# Altium PCB layout.PcbDoc (part 8 of 11)
Units mil, origin at the board's own origin, x right, y up, seen from the top; angles counter-clockwise.
Board outline 3543.31 x 3149.61 mil, 2 copper layers (Top Layer, Bottom Layer); 78 components, 73 nets, 327 pads, 143 vias.
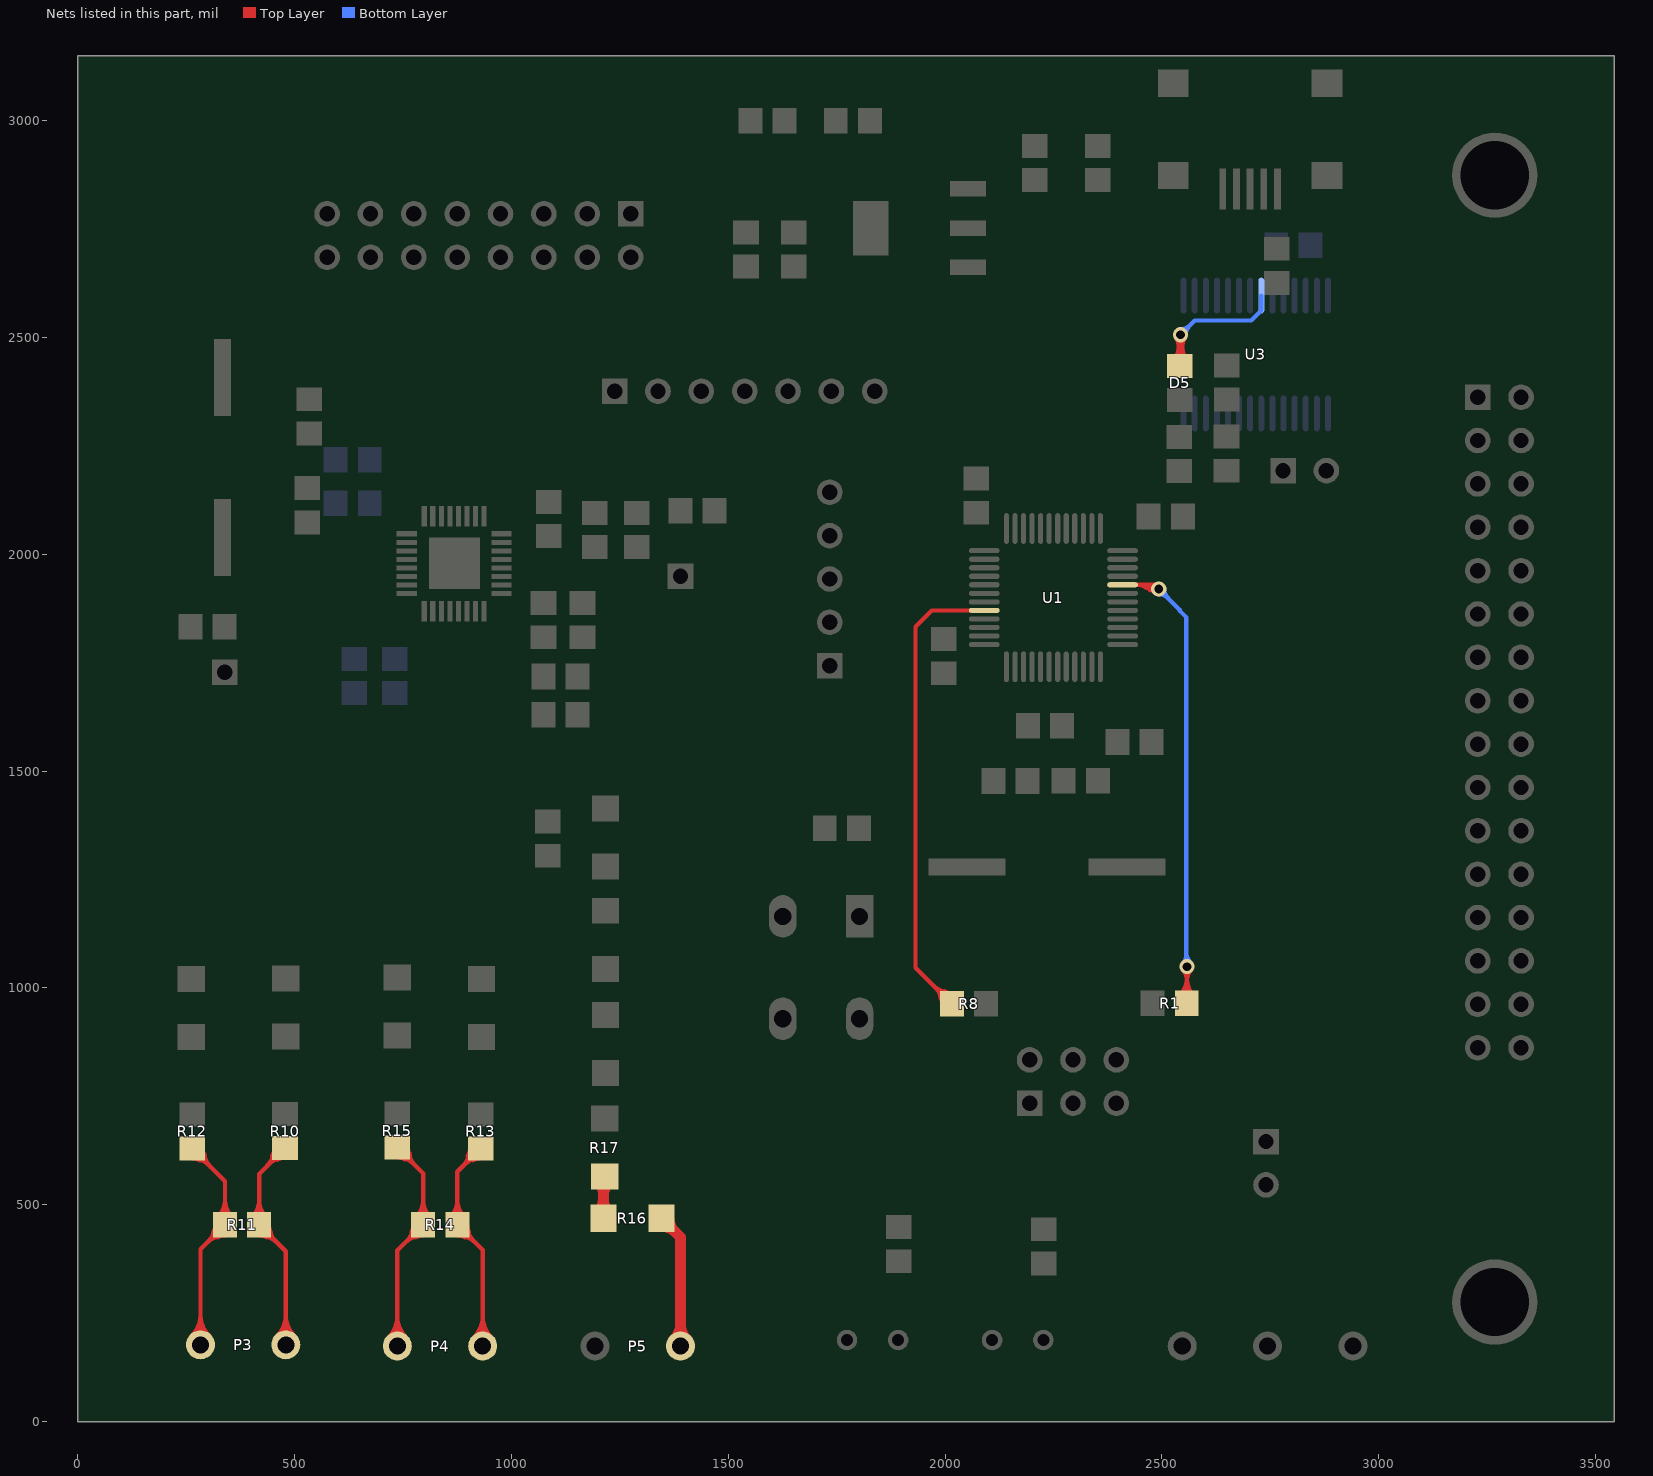
[diagram p8: the nets of this part, all layers, seen from the top]

## Via types
v1: diameter 35, hole 20, Top Layer to Bottom Layer, tented both sides, 113 vias
v2: diameter 35, hole 20, Top Layer to Bottom Layer, 28 vias
v3: diameter 35.43, hole 35.43, Top Layer to Bottom Layer, 2 vias

## Nets (pads, with @x,y where several pads share a name; then routed paths per layer and width w, separated by ;. In a path a pad name is that pad's centre, name@x,y a point inside that pad or via, vN(x,y) a via of type N, cw(c..) or ccw(c..) an arc to the next point about the centre after c; other vN are vias at no path point) (continued)
NetD5_2: D5.2 U3.22 | length 2738.7
  Top Layer w10: D5.2@2543,2444.37 v2(2543,2506) ; D5.2@2527.02,2450.32 ccw(c2488.43,2488.91) v2@2543,2488.91 ; D5.2@2527.02,2450.32 ccw(c2488.43,2488.91) v2@2543,2488.91 ; D5.2@2527.02,2450.32 ccw(c2488.43,2488.91) v2@2543,2488.91 ; D5.2@2527.02,2450.32 ccw(c2488.43,2488.91) v2@2543,2488.91 ; D5.2@2527.02,2450.32 ccw(c2488.43,2488.91) v2@2543,2488.91 ; v2@2532.64,2499 cw(c2502.31,2478.5) 2537.67,2469.03 ; v2@2532.64,2499 cw(c2502.31,2478.5) 2537.67,2469.03 ; v2@2532.64,2499 cw(c2502.31,2478.5) 2537.67,2469.03 ; v2@2532.64,2499 cw(c2502.31,2478.5) 2537.67,2469.03 ; v2@2532.64,2499 cw(c2502.31,2478.5) 2537.67,2469.03 ; v2@2532.64,2499 cw(c2502.31,2478.5) 2537.67,2469.03 ; v2@2532.64,2499 cw(c2502.31,2478.5) 2537.67,2469.03 ; v2@2532.64,2499 cw(c2502.31,2478.5) 2537.67,2469.03 ; v2@2532.64,2499 cw(c2502.31,2478.5) 2537.67,2469.03 ; v2@2532.64,2499 cw(c2502.31,2478.5) 2537.67,2469.03 ; v2@2532.64,2499 cw(c2502.31,2478.5) 2537.67,2469.03 ; v2@2532.64,2499 cw(c2502.31,2478.5) 2537.67,2469.03 ; v2@2532.64,2499 cw(c2502.31,2478.5) 2537.67,2469.03 ; v2@2532.64,2499 cw(c2502.31,2478.5) 2537.67,2469.03 ; v2@2532.64,2499 cw(c2502.31,2478.5) 2537.67,2469.03 ; D5.2@2534.09,2443.25 ccw(c2512.57,2464.77) 2543,2464.77 ; D5.2@2534.09,2443.25 ccw(c2512.57,2464.77) 2543,2464.77 ; D5.2@2534.09,2443.25 ccw(c2512.57,2464.77) 2543,2464.77 ; D5.2@2534.09,2443.25 ccw(c2512.57,2464.77) 2543,2464.77 ; D5.2@2534.09,2443.25 ccw(c2512.57,2464.77) 2543,2464.77 ; v2@2534.16,2497.16 cw(c2512.82,2475.82) 2543,2475.82 ; v2@2534.16,2497.16 cw(c2512.82,2475.82) 2543,2475.82 ; v2@2534.16,2497.16 cw(c2512.82,2475.82) 2543,2475.82 ; v2@2534.16,2497.16 cw(c2512.82,2475.82) 2543,2475.82 ; v2@2534.16,2497.16 cw(c2512.82,2475.82) 2543,2475.82 ; v2@2536.75,2495.17 cw(c2529.28,2482.24) 2543.71,2486.1 ; v2@2536.75,2495.17 cw(c2529.28,2482.24) 2543.71,2486.1 ; v2@2536.75,2495.17 cw(c2529.28,2482.24) 2543.71,2486.1 ; v2@2536.75,2495.17 cw(c2529.28,2482.24) 2543.71,2486.1 ; v2@2536.75,2495.17 cw(c2529.28,2482.24) 2543.71,2486.1 ; v2@2536.75,2495.17 cw(c2529.28,2482.24) 2543.71,2486.1 ; v2@2536.75,2495.17 cw(c2529.28,2482.24) 2543.71,2486.1 ; v2@2536.75,2495.17 cw(c2529.28,2482.24) 2543.71,2486.1 ; v2@2536.75,2495.17 cw(c2529.28,2482.24) 2543.71,2486.1 ; v2@2536.75,2495.17 cw(c2529.28,2482.24) 2543.71,2486.1 ; v2@2536.75,2495.17 cw(c2529.28,2482.24) 2543.71,2486.1 ; v2@2536.75,2495.17 cw(c2529.28,2482.24) 2543.71,2486.1 ; v2@2536.75,2495.17 cw(c2529.28,2482.24) 2543.71,2486.1 ; v2@2536.75,2495.17 cw(c2529.28,2482.24) 2543.71,2486.1 ; v2@2536.75,2495.17 cw(c2529.28,2482.24) 2543.71,2486.1 ; 2542.23,2486.02 cw(c2556.79,2482.12) v2@2549.25,2495.17 ; 2542.23,2486.02 cw(c2556.79,2482.12) v2@2549.25,2495.17 ; 2542.23,2486.02 cw(c2556.79,2482.12) v2@2549.25,2495.17 ; 2542.23,2486.02 cw(c2556.79,2482.12) v2@2549.25,2495.17 ; 2542.23,2486.02 cw(c2556.79,2482.12) v2@2549.25,2495.17 ; 2542.23,2486.02 cw(c2556.79,2482.12) v2@2549.25,2495.17 ; 2542.23,2486.02 cw(c2556.79,2482.12) v2@2549.25,2495.17 ; 2542.23,2486.02 cw(c2556.79,2482.12) v2@2549.25,2495.17 ; 2542.23,2486.02 cw(c2556.79,2482.12) v2@2549.25,2495.17 ; 2542.23,2486.02 cw(c2556.79,2482.12) v2@2549.25,2495.17 ; 2542.23,2486.02 cw(c2556.79,2482.12) v2@2549.25,2495.17 ; 2542.23,2486.02 cw(c2556.79,2482.12) v2@2549.25,2495.17 ; 2542.23,2486.02 cw(c2556.79,2482.12) v2@2549.25,2495.17 ; 2542.23,2486.02 cw(c2556.79,2482.12) v2@2549.25,2495.17 ; 2542.23,2486.02 cw(c2556.79,2482.12) v2@2549.25,2495.17 ; 2543,2464.61 ccw(c2573.21,2464.61) D5.2@2551.85,2443.25 ; 2543,2464.61 ccw(c2573.21,2464.61) D5.2@2551.85,2443.25 ; 2543,2464.61 ccw(c2573.21,2464.61) D5.2@2551.85,2443.25 ; 2543,2464.61 ccw(c2573.21,2464.61) D5.2@2551.85,2443.25 ; 2543,2464.61 ccw(c2573.21,2464.61) D5.2@2551.85,2443.25 ; 2543,2475.82 cw(c2573.18,2475.82) v2@2551.84,2497.16 ; 2543,2475.82 cw(c2573.18,2475.82) v2@2551.84,2497.16 ; 2543,2475.82 cw(c2573.18,2475.82) v2@2551.84,2497.16 ; 2543,2475.82 cw(c2573.18,2475.82) v2@2551.84,2497.16 ; 2543,2475.82 cw(c2573.18,2475.82) v2@2551.84,2497.16 ; v2@2543,2488.76 ccw(c2597.35,2488.76) D5.2@2558.92,2450.32 ; v2@2543,2488.76 ccw(c2597.35,2488.76) D5.2@2558.92,2450.32 ; v2@2543,2488.76 ccw(c2597.35,2488.76) D5.2@2558.92,2450.32 ; v2@2543,2488.76 ccw(c2597.35,2488.76) D5.2@2558.92,2450.32 ; v2@2543,2488.76 ccw(c2597.35,2488.76) D5.2@2558.92,2450.32 ; 2548.28,2469.05 cw(c2583.5,2478.49) v2@2553.34,2498.98 ; 2548.28,2469.05 cw(c2583.5,2478.49) v2@2553.34,2498.98 ; 2548.28,2469.05 cw(c2583.5,2478.49) v2@2553.34,2498.98 ; 2548.28,2469.05 cw(c2583.5,2478.49) v2@2553.34,2498.98 ; 2548.28,2469.05 cw(c2583.5,2478.49) v2@2553.34,2498.98 ; 2548.28,2469.05 cw(c2583.5,2478.49) v2@2553.34,2498.98 ; 2548.28,2469.05 cw(c2583.5,2478.49) v2@2553.34,2498.98 ; 2548.28,2469.05 cw(c2583.5,2478.49) v2@2553.34,2498.98 ; 2548.28,2469.05 cw(c2583.5,2478.49) v2@2553.34,2498.98 ; 2548.28,2469.05 cw(c2583.5,2478.49) v2@2553.34,2498.98 ; 2548.28,2469.05 cw(c2583.5,2478.49) v2@2553.34,2498.98 ; 2548.28,2469.05 cw(c2583.5,2478.49) v2@2553.34,2498.98 ; 2548.28,2469.05 cw(c2583.5,2478.49) v2@2553.34,2498.98 ; 2548.28,2469.05 cw(c2583.5,2478.49) v2@2553.34,2498.98 ; 2548.28,2469.05 cw(c2583.5,2478.49) v2@2553.34,2498.98
  Bottom Layer w10: v2(2543,2506) 2576,2539 2706.03,2539 2729.33,2562.3 U3.22@2729.33,2596.46 ; v2@2543,2518.5 ccw(c2543,2548.68) 2564.34,2527.34 ; v2@2543,2518.5 ccw(c2543,2548.68) 2564.34,2527.34 ; v2@2543,2518.5 ccw(c2543,2548.68) 2564.34,2527.34 ; v2@2543,2518.5 ccw(c2543,2548.68) 2564.34,2527.34 ; v2@2543,2518.5 ccw(c2543,2548.68) 2564.34,2527.34 ; v2@2555.5,2506 cw(c2585.68,2506) 2564.34,2527.34 ; v2@2555.5,2506 cw(c2585.68,2506) 2564.34,2527.34 ; v2@2555.5,2506 cw(c2585.68,2506) 2564.34,2527.34 ; v2@2555.5,2506 cw(c2585.68,2506) 2564.34,2527.34 ; v2@2555.5,2506 cw(c2585.68,2506) 2564.34,2527.34
NetP3_1: P3.1 R11.2 R12.1 | length 5615.5
  Top Layer w10: R12.1@264,629.63 339.63,554 R11.2@339.63,454 283,397.37 P3.1@283,177 ; R12.1@258.64,628.37 ccw(c290.31,633.82) R12.1@281.99,602.78 ; R12.1@258.64,628.37 ccw(c290.31,633.82) R12.1@281.99,602.78 ; R12.1@258.64,628.37 ccw(c290.31,633.82) R12.1@281.99,602.78 ; R12.1@258.64,628.37 ccw(c290.31,633.82) R12.1@281.99,602.78 ; R12.1@258.64,628.37 ccw(c290.31,633.82) R12.1@281.99,602.78 ; R12.1@258.64,628.37 ccw(c290.31,633.82) R12.1@281.99,602.78 ; R12.1@258.64,628.37 ccw(c290.31,633.82) R12.1@281.99,602.78 ; R12.1@258.64,628.37 ccw(c290.31,633.82) R12.1@281.99,602.78 ; R12.1@258.64,628.37 ccw(c290.31,633.82) R12.1@281.99,602.78 ; R12.1@258.64,628.37 ccw(c290.31,633.82) R12.1@281.99,602.78 ; P3.1@262.87,197.13 ccw(c214.28,245.72) 283,245.72 ; P3.1@262.87,197.13 ccw(c214.28,245.72) 283,245.72 ; P3.1@262.87,197.13 ccw(c214.28,245.72) 283,245.72 ; P3.1@262.87,197.13 ccw(c214.28,245.72) 283,245.72 ; P3.1@262.87,197.13 ccw(c214.28,245.72) 283,245.72 ; R12.1@265.38,627.14 cw(c255.33,584.59) 297.56,595.9 ; R12.1@265.38,627.14 cw(c255.33,584.59) 297.56,595.9 ; R12.1@265.38,627.14 cw(c255.33,584.59) 297.56,595.9 ; R12.1@265.38,627.14 cw(c255.33,584.59) 297.56,595.9 ; R12.1@265.38,627.14 cw(c255.33,584.59) 297.56,595.9 ; R12.1@265.38,627.14 cw(c255.33,584.59) 297.56,595.9 ; R12.1@265.38,627.14 cw(c255.33,584.59) 297.56,595.9 ; R12.1@265.38,627.14 cw(c255.33,584.59) 297.56,595.9 ; R12.1@265.38,627.14 cw(c255.33,584.59) 297.56,595.9 ; R12.1@265.38,627.14 cw(c255.33,584.59) 297.56,595.9 ; R12.1@265.97,607.07 cw(c265.97,557.36) 301.12,592.51 ; R12.1@265.97,607.07 cw(c265.97,557.36) 301.12,592.51 ; R12.1@265.97,607.07 cw(c265.97,557.36) 301.12,592.51 ; R12.1@265.97,607.07 cw(c265.97,557.36) 301.12,592.51 ; R12.1@265.97,607.07 cw(c265.97,557.36) 301.12,592.51 ; R12.1@267.68,636.87 cw(c259.7,603.09) R12.1@293.23,612.07 ; R12.1@267.68,636.87 cw(c259.7,603.09) R12.1@293.23,612.07 ; R12.1@267.68,636.87 cw(c259.7,603.09) R12.1@293.23,612.07 ; R12.1@267.68,636.87 cw(c259.7,603.09) R12.1@293.23,612.07 ; R12.1@267.68,636.87 cw(c259.7,603.09) R12.1@293.23,612.07 ; R12.1@267.68,636.87 cw(c259.7,603.09) R12.1@293.23,612.07 ; R12.1@267.68,636.87 cw(c259.7,603.09) R12.1@293.23,612.07 ; R12.1@267.68,636.87 cw(c259.7,603.09) R12.1@293.23,612.07 ; R12.1@267.68,636.87 cw(c259.7,603.09) R12.1@293.23,612.07 ; R12.1@267.68,636.87 cw(c259.7,603.09) R12.1@293.23,612.07 ; P3.1@269.94,190.06 ccw(c238.42,221.58) 283,221.58 ; P3.1@269.94,190.06 ccw(c238.42,221.58) 283,221.58 ; P3.1@269.94,190.06 ccw(c238.42,221.58) 283,221.58 ; P3.1@269.94,190.06 ccw(c238.42,221.58) 283,221.58 ; P3.1@269.94,190.06 ccw(c238.42,221.58) 283,221.58 ; R12.1@278.53,629.63 ccw(c313.6,629.63) R12.1@288.8,604.83 ; R12.1@278.53,629.63 ccw(c313.6,629.63) R12.1@288.8,604.83 ; R12.1@278.53,629.63 ccw(c313.6,629.63) R12.1@288.8,604.83 ; R12.1@278.53,629.63 ccw(c313.6,629.63) R12.1@288.8,604.83 ; R12.1@278.53,629.63 ccw(c313.6,629.63) R12.1@288.8,604.83 ; 283,221.58 ccw(c327.58,221.58) P3.1@296.06,190.06 ; 283,221.58 ccw(c327.58,221.58) P3.1@296.06,190.06 ; 283,221.58 ccw(c327.58,221.58) P3.1@296.06,190.06 ; 283,221.58 ccw(c327.58,221.58) P3.1@296.06,190.06 ; 283,221.58 ccw(c327.58,221.58) P3.1@296.06,190.06 ; 283,245.72 ccw(c351.72,245.72) P3.1@303.13,197.13 ; 283,245.72 ccw(c351.72,245.72) P3.1@303.13,197.13 ; 283,245.72 ccw(c351.72,245.72) P3.1@303.13,197.13 ; 283,245.72 ccw(c351.72,245.72) P3.1@303.13,197.13 ; 283,245.72 ccw(c351.72,245.72) P3.1@303.13,197.13 ; R12.1@288.53,629.63 ccw(c347.74,629.63) 305.87,587.76 ; R12.1@288.53,629.63 ccw(c347.74,629.63) 305.87,587.76 ; R12.1@288.53,629.63 ccw(c347.74,629.63) 305.87,587.76 ; R12.1@288.53,629.63 ccw(c347.74,629.63) 305.87,587.76 ; R12.1@288.53,629.63 ccw(c347.74,629.63) 305.87,587.76 ; 297.76,412.13 cw(c339.63,370.26) R11.2@339.63,429.47 ; 297.76,412.13 cw(c339.63,370.26) R11.2@339.63,429.47 ; 297.76,412.13 cw(c339.63,370.26) R11.2@339.63,429.47 ; 297.76,412.13 cw(c339.63,370.26) R11.2@339.63,429.47 ; 297.76,412.13 cw(c339.63,370.26) R11.2@339.63,429.47 ; 302.51,416.88 ccw(c267.36,452.03) R11.2@317.07,452.03 ; 302.51,416.88 ccw(c267.36,452.03) R11.2@317.07,452.03 ; 302.51,416.88 ccw(c267.36,452.03) R11.2@317.07,452.03 ; 302.51,416.88 ccw(c267.36,452.03) R11.2@317.07,452.03 ; 302.51,416.88 ccw(c267.36,452.03) R11.2@317.07,452.03 ; 305.9,420.44 ccw(c294.59,462.67) R11.2@337.14,452.62 ; 305.9,420.44 ccw(c294.59,462.67) R11.2@337.14,452.62 ; 305.9,420.44 ccw(c294.59,462.67) R11.2@337.14,452.62 ; 305.9,420.44 ccw(c294.59,462.67) R11.2@337.14,452.62 ; 305.9,420.44 ccw(c294.59,462.67) R11.2@337.14,452.62 ; 305.9,420.44 ccw(c294.59,462.67) R11.2@337.14,452.62 ; 305.9,420.44 ccw(c294.59,462.67) R11.2@337.14,452.62 ; 305.9,420.44 ccw(c294.59,462.67) R11.2@337.14,452.62 ; 305.9,420.44 ccw(c294.59,462.67) R11.2@337.14,452.62 ; 305.9,420.44 ccw(c294.59,462.67) R11.2@337.14,452.62 ; R11.2@312.78,436.01 cw(c343.82,427.69) R11.2@338.37,459.36 ; R11.2@312.78,436.01 cw(c343.82,427.69) R11.2@338.37,459.36 ; R11.2@312.78,436.01 cw(c343.82,427.69) R11.2@338.37,459.36 ; R11.2@312.78,436.01 cw(c343.82,427.69) R11.2@338.37,459.36 ; R11.2@312.78,436.01 cw(c343.82,427.69) R11.2@338.37,459.36 ; R11.2@312.78,436.01 cw(c343.82,427.69) R11.2@338.37,459.36 ; R11.2@312.78,436.01 cw(c343.82,427.69) R11.2@338.37,459.36 ; R11.2@312.78,436.01 cw(c343.82,427.69) R11.2@338.37,459.36 ; R11.2@312.78,436.01 cw(c343.82,427.69) R11.2@338.37,459.36 ; R11.2@312.78,436.01 cw(c343.82,427.69) R11.2@338.37,459.36 ; R11.2@314.83,429.2 cw(c339.63,404.4) R11.2@339.63,439.47 ; R11.2@314.83,429.2 cw(c339.63,404.4) R11.2@339.63,439.47 ; R11.2@314.83,429.2 cw(c339.63,404.4) R11.2@339.63,439.47 ; R11.2@314.83,429.2 cw(c339.63,404.4) R11.2@339.63,439.47 ; R11.2@314.83,429.2 cw(c339.63,404.4) R11.2@339.63,439.47 ; R11.2@322.07,424.77 ccw(c313.09,458.3) R11.2@346.87,450.32 ; R11.2@322.07,424.77 ccw(c313.09,458.3) R11.2@346.87,450.32 ; R11.2@322.07,424.77 ccw(c313.09,458.3) R11.2@346.87,450.32 ; R11.2@322.07,424.77 ccw(c313.09,458.3) R11.2@346.87,450.32 ; R11.2@322.07,424.77 ccw(c313.09,458.3) R11.2@346.87,450.32 ; R11.2@322.07,424.77 ccw(c313.09,458.3) R11.2@346.87,450.32 ; R11.2@322.07,424.77 ccw(c313.09,458.3) R11.2@346.87,450.32 ; R11.2@322.07,424.77 ccw(c313.09,458.3) R11.2@346.87,450.32 ; R11.2@322.07,424.77 ccw(c313.09,458.3) R11.2@346.87,450.32 ; R11.2@322.07,424.77 ccw(c313.09,458.3) R11.2@346.87,450.32 ; R11.2@323.68,471.92 ccw(c285.17,510.43) 339.63,510.43 ; R11.2@323.68,471.92 ccw(c285.17,510.43) 339.63,510.43 ; R11.2@323.68,471.92 ccw(c285.17,510.43) 339.63,510.43 ; R11.2@323.68,471.92 ccw(c285.17,510.43) 339.63,510.43 ; R11.2@323.68,471.92 ccw(c285.17,510.43) 339.63,510.43 ; R11.2@330.75,464.85 ccw(c309.31,486.29) 339.63,486.29 ; R11.2@330.75,464.85 ccw(c309.31,486.29) 339.63,486.29 ; R11.2@330.75,464.85 ccw(c309.31,486.29) 339.63,486.29 ; R11.2@330.75,464.85 ccw(c309.31,486.29) 339.63,486.29 ; R11.2@330.75,464.85 ccw(c309.31,486.29) 339.63,486.29 ; 339.63,486.29 ccw(c369.95,486.29) R11.2@348.51,464.85 ; 339.63,486.29 ccw(c369.95,486.29) R11.2@348.51,464.85 ; 339.63,486.29 ccw(c369.95,486.29) R11.2@348.51,464.85 ; 339.63,486.29 ccw(c369.95,486.29) R11.2@348.51,464.85 ; 339.63,486.29 ccw(c369.95,486.29) R11.2@348.51,464.85 ; 339.63,510.43 ccw(c394.09,510.43) R11.2@355.58,471.92 ; 339.63,510.43 ccw(c394.09,510.43) R11.2@355.58,471.92 ; 339.63,510.43 ccw(c394.09,510.43) R11.2@355.58,471.92 ; 339.63,510.43 ccw(c394.09,510.43) R11.2@355.58,471.92 ; 339.63,510.43 ccw(c394.09,510.43) R11.2@355.58,471.92
NetP3_2: P3.2 R10.1 R11.1 | length 5611.9
  Top Layer w10: R10.1@478,630.63 418.37,571 R11.1@418.37,454 479.85,392.52 P3.2@479.85,177 ; R11.1@402.42,471.92 ccw(c363.91,510.43) 418.37,510.43 ; R11.1@402.42,471.92 ccw(c363.91,510.43) 418.37,510.43 ; R11.1@402.42,471.92 ccw(c363.91,510.43) 418.37,510.43 ; R11.1@402.42,471.92 ccw(c363.91,510.43) 418.37,510.43 ; R11.1@402.42,471.92 ccw(c363.91,510.43) 418.37,510.43 ; R11.1@409.49,464.85 ccw(c388.05,486.29) 418.37,486.29 ; R11.1@409.49,464.85 ccw(c388.05,486.29) 418.37,486.29 ; R11.1@409.49,464.85 ccw(c388.05,486.29) 418.37,486.29 ; R11.1@409.49,464.85 ccw(c388.05,486.29) 418.37,486.29 ; R11.1@409.49,464.85 ccw(c388.05,486.29) 418.37,486.29 ; R11.1@411.13,450.32 ccw(c444.91,458.3) R11.1@435.93,424.77 ; R11.1@411.13,450.32 ccw(c444.91,458.3) R11.1@435.93,424.77 ; R11.1@411.13,450.32 ccw(c444.91,458.3) R11.1@435.93,424.77 ; R11.1@411.13,450.32 ccw(c444.91,458.3) R11.1@435.93,424.77 ; R11.1@411.13,450.32 ccw(c444.91,458.3) R11.1@435.93,424.77 ; R11.1@411.13,450.32 ccw(c444.91,458.3) R11.1@435.93,424.77 ; R11.1@411.13,450.32 ccw(c444.91,458.3) R11.1@435.93,424.77 ; R11.1@411.13,450.32 ccw(c444.91,458.3) R11.1@435.93,424.77 ; R11.1@411.13,450.32 ccw(c444.91,458.3) R11.1@435.93,424.77 ; R11.1@411.13,450.32 ccw(c444.91,458.3) R11.1@435.93,424.77 ; R11.1@418.37,429.47 cw(c418.37,370.26) 460.24,412.13 ; R11.1@418.37,429.47 cw(c418.37,370.26) 460.24,412.13 ; R11.1@418.37,429.47 cw(c418.37,370.26) 460.24,412.13 ; R11.1@418.37,429.47 cw(c418.37,370.26) 460.24,412.13 ; R11.1@418.37,429.47 cw(c418.37,370.26) 460.24,412.13 ; R11.1@418.37,439.47 cw(c418.37,404.4) R11.1@443.17,429.2 ; R11.1@418.37,439.47 cw(c418.37,404.4) R11.1@443.17,429.2 ; R11.1@418.37,439.47 cw(c418.37,404.4) R11.1@443.17,429.2 ; R11.1@418.37,439.47 cw(c418.37,404.4) R11.1@443.17,429.2 ; R11.1@418.37,439.47 cw(c418.37,404.4) R11.1@443.17,429.2 ; 418.37,486.29 ccw(c448.69,486.29) R11.1@427.25,464.85 ; 418.37,486.29 ccw(c448.69,486.29) R11.1@427.25,464.85 ; 418.37,486.29 ccw(c448.69,486.29) R11.1@427.25,464.85 ; 418.37,486.29 ccw(c448.69,486.29) R11.1@427.25,464.85 ; 418.37,486.29 ccw(c448.69,486.29) R11.1@427.25,464.85 ; 418.37,510.43 ccw(c472.83,510.43) R11.1@434.32,471.92 ; 418.37,510.43 ccw(c472.83,510.43) R11.1@434.32,471.92 ; 418.37,510.43 ccw(c472.83,510.43) R11.1@434.32,471.92 ; 418.37,510.43 ccw(c472.83,510.43) R11.1@434.32,471.92 ; 418.37,510.43 ccw(c472.83,510.43) R11.1@434.32,471.92 ; R11.1@419.63,459.36 cw(c414.18,427.69) R11.1@445.22,436.01 ; R11.1@419.63,459.36 cw(c414.18,427.69) R11.1@445.22,436.01 ; R11.1@419.63,459.36 cw(c414.18,427.69) R11.1@445.22,436.01 ; R11.1@419.63,459.36 cw(c414.18,427.69) R11.1@445.22,436.01 ; R11.1@419.63,459.36 cw(c414.18,427.69) R11.1@445.22,436.01 ; R11.1@419.63,459.36 cw(c414.18,427.69) R11.1@445.22,436.01 ; R11.1@419.63,459.36 cw(c414.18,427.69) R11.1@445.22,436.01 ; R11.1@419.63,459.36 cw(c414.18,427.69) R11.1@445.22,436.01 ; R11.1@419.63,459.36 cw(c414.18,427.69) R11.1@445.22,436.01 ; R11.1@419.63,459.36 cw(c414.18,427.69) R11.1@445.22,436.01 ; R11.1@420.86,452.62 ccw(c463.41,462.67) 452.1,420.44 ; R11.1@420.86,452.62 ccw(c463.41,462.67) 452.1,420.44 ; R11.1@420.86,452.62 ccw(c463.41,462.67) 452.1,420.44 ; R11.1@420.86,452.62 ccw(c463.41,462.67) 452.1,420.44 ; R11.1@420.86,452.62 ccw(c463.41,462.67) 452.1,420.44 ; R11.1@420.86,452.62 ccw(c463.41,462.67) 452.1,420.44 ; R11.1@420.86,452.62 ccw(c463.41,462.67) 452.1,420.44 ; R11.1@420.86,452.62 ccw(c463.41,462.67) 452.1,420.44 ; R11.1@420.86,452.62 ccw(c463.41,462.67) 452.1,420.44 ; R11.1@420.86,452.62 ccw(c463.41,462.67) 452.1,420.44 ; 436.13,588.76 ccw(c394.26,630.63) R10.1@453.47,630.63 ; 436.13,588.76 ccw(c394.26,630.63) R10.1@453.47,630.63 ; 436.13,588.76 ccw(c394.26,630.63) R10.1@453.47,630.63 ; 436.13,588.76 ccw(c394.26,630.63) R10.1@453.47,630.63 ; 436.13,588.76 ccw(c394.26,630.63) R10.1@453.47,630.63 ; 440.88,593.51 cw(c476.03,558.36) R10.1@476.03,608.07 ; 440.88,593.51 cw(c476.03,558.36) R10.1@476.03,608.07 ; 440.88,593.51 cw(c476.03,558.36) R10.1@476.03,608.07 ; 440.88,593.51 cw(c476.03,558.36) R10.1@476.03,608.07 ; 440.88,593.51 cw(c476.03,558.36) R10.1@476.03,608.07 ; R11.1@440.93,452.03 ccw(c490.64,452.03) 455.49,416.88 ; R11.1@440.93,452.03 ccw(c490.64,452.03) 455.49,416.88 ; R11.1@440.93,452.03 ccw(c490.64,452.03) 455.49,416.88 ; R11.1@440.93,452.03 ccw(c490.64,452.03) 455.49,416.88 ; R11.1@440.93,452.03 ccw(c490.64,452.03) 455.49,416.88 ; 444.44,596.9 cw(c486.67,585.59) R10.1@476.62,628.14 ; 444.44,596.9 cw(c486.67,585.59) R10.1@476.62,628.14 ; 444.44,596.9 cw(c486.67,585.59) R10.1@476.62,628.14 ; 444.44,596.9 cw(c486.67,585.59) R10.1@476.62,628.14 ; 444.44,596.9 cw(c486.67,585.59) R10.1@476.62,628.14 ; 444.44,596.9 cw(c486.67,585.59) R10.1@476.62,628.14 ; 444.44,596.9 cw(c486.67,585.59) R10.1@476.62,628.14 ; 444.44,596.9 cw(c486.67,585.59) R10.1@476.62,628.14 ; 444.44,596.9 cw(c486.67,585.59) R10.1@476.62,628.14 ; 444.44,596.9 cw(c486.67,585.59) R10.1@476.62,628.14 ; R10.1@448.77,613.07 cw(c482.3,604.09) R10.1@474.32,637.87 ; R10.1@448.77,613.07 cw(c482.3,604.09) R10.1@474.32,637.87 ; R10.1@448.77,613.07 cw(c482.3,604.09) R10.1@474.32,637.87 ; R10.1@448.77,613.07 cw(c482.3,604.09) R10.1@474.32,637.87 ; R10.1@448.77,613.07 cw(c482.3,604.09) R10.1@474.32,637.87 ; R10.1@448.77,613.07 cw(c482.3,604.09) R10.1@474.32,637.87 ; R10.1@448.77,613.07 cw(c482.3,604.09) R10.1@474.32,637.87 ; R10.1@448.77,613.07 cw(c482.3,604.09) R10.1@474.32,637.87 ; R10.1@448.77,613.07 cw(c482.3,604.09) R10.1@474.32,637.87 ; R10.1@448.77,613.07 cw(c482.3,604.09) R10.1@474.32,637.87 ; R10.1@453.2,605.83 ccw(c428.4,630.63) R10.1@463.47,630.63 ; R10.1@453.2,605.83 ccw(c428.4,630.63) R10.1@463.47,630.63 ; R10.1@453.2,605.83 ccw(c428.4,630.63) R10.1@463.47,630.63 ; R10.1@453.2,605.83 ccw(c428.4,630.63) R10.1@463.47,630.63 ; R10.1@453.2,605.83 ccw(c428.4,630.63) R10.1@463.47,630.63 ; P3.2@459.72,197.13 ccw(c411.13,245.72) 479.85,245.72 ; P3.2@459.72,197.13 ccw(c411.13,245.72) 479.85,245.72 ; P3.2@459.72,197.13 ccw(c411.13,245.72) 479.85,245.72 ; P3.2@459.72,197.13 ccw(c411.13,245.72) 479.85,245.72 ; P3.2@459.72,197.13 ccw(c411.13,245.72) 479.85,245.72 ; R10.1@460.01,603.78 ccw(c451.69,634.82) R10.1@483.36,629.37 ; R10.1@460.01,603.78 ccw(c451.69,634.82) R10.1@483.36,629.37 ; R10.1@460.01,603.78 ccw(c451.69,634.82) R10.1@483.36,629.37 ; R10.1@460.01,603.78 ccw(c451.69,634.82) R10.1@483.36,629.37 ; R10.1@460.01,603.78 ccw(c451.69,634.82) R10.1@483.36,629.37 ; R10.1@460.01,603.78 ccw(c451.69,634.82) R10.1@483.36,629.37 ; R10.1@460.01,603.78 ccw(c451.69,634.82) R10.1@483.36,629.37 ; R10.1@460.01,603.78 ccw(c451.69,634.82) R10.1@483.36,629.37 ; R10.1@460.01,603.78 ccw(c451.69,634.82) R10.1@483.36,629.37 ; R10.1@460.01,603.78 ccw(c451.69,634.82) R10.1@483.36,629.37 ; P3.2@466.79,190.06 ccw(c435.27,221.58) 479.85,221.58 ; P3.2@466.79,190.06 ccw(c435.27,221.58) 479.85,221.58 ; P3.2@466.79,190.06 ccw(c435.27,221.58) 479.85,221.58 ; P3.2@466.79,190.06 ccw(c435.27,221.58) 479.85,221.58 ; P3.2@466.79,190.06 ccw(c435.27,221.58) 479.85,221.58 ; 479.85,221.58 ccw(c524.43,221.58) P3.2@492.91,190.06 ; 479.85,221.58 ccw(c524.43,221.58) P3.2@492.91,190.06 ; 479.85,221.58 ccw(c524.43,221.58) P3.2@492.91,190.06 ; 479.85,221.58 ccw(c524.43,221.58) P3.2@492.91,190.06 ; 479.85,221.58 ccw(c524.43,221.58) P3.2@492.91,190.06 ; 479.85,245.72 ccw(c548.57,245.72) P3.2@499.98,197.13 ; 479.85,245.72 ccw(c548.57,245.72) P3.2@499.98,197.13 ; 479.85,245.72 ccw(c548.57,245.72) P3.2@499.98,197.13 ; 479.85,245.72 ccw(c548.57,245.72) P3.2@499.98,197.13 ; 479.85,245.72 ccw(c548.57,245.72) P3.2@499.98,197.13
NetP4_1: P4.1 R14.2 R15.1 | length 5615.1
  Top Layer w10: P4.1@737,174 737,394.37 R14.2@796.63,454 796.63,572 R15.1@737,631.63 ; P4.1@716.87,194.13 ccw(c668.28,242.72) 737,242.72 ; P4.1@716.87,194.13 ccw(c668.28,242.72) 737,242.72 ; P4.1@716.87,194.13 ccw(c668.28,242.72) 737,242.72 ; P4.1@716.87,194.13 ccw(c668.28,242.72) 737,242.72 ; P4.1@716.87,194.13 ccw(c668.28,242.72) 737,242.72 ; P4.1@723.94,187.06 ccw(c692.42,218.58) 737,218.58 ; P4.1@723.94,187.06 ccw(c692.42,218.58) 737,218.58 ; P4.1@723.94,187.06 ccw(c692.42,218.58) 737,218.58 ; P4.1@723.94,187.06 ccw(c692.42,218.58) 737,218.58 ; P4.1@723.94,187.06 ccw(c692.42,218.58) 737,218.58 ; R15.1@731.64,630.37 ccw(c763.31,635.82) R15.1@754.99,604.78 ; R15.1@731.64,630.37 ccw(c763.31,635.82) R15.1@754.99,604.78 ; R15.1@731.64,630.37 ccw(c763.31,635.82) R15.1@754.99,604.78 ; R15.1@731.64,630.37 ccw(c763.31,635.82) R15.1@754.99,604.78 ; R15.1@731.64,630.37 ccw(c763.31,635.82) R15.1@754.99,604.78 ; R15.1@731.64,630.37 ccw(c763.31,635.82) R15.1@754.99,604.78 ; R15.1@731.64,630.37 ccw(c763.31,635.82) R15.1@754.99,604.78 ; R15.1@731.64,630.37 ccw(c763.31,635.82) R15.1@754.99,604.78 ; R15.1@731.64,630.37 ccw(c763.31,635.82) R15.1@754.99,604.78 ; R15.1@731.64,630.37 ccw(c763.31,635.82) R15.1@754.99,604.78 ; 737,218.58 ccw(c781.58,218.58) P4.1@750.06,187.06 ; 737,218.58 ccw(c781.58,218.58) P4.1@750.06,187.06 ; 737,218.58 ccw(c781.58,218.58) P4.1@750.06,187.06 ; 737,218.58 ccw(c781.58,218.58) P4.1@750.06,187.06 ; 737,218.58 ccw(c781.58,218.58) P4.1@750.06,187.06 ; 737,242.72 ccw(c805.72,242.72) P4.1@757.13,194.13 ; 737,242.72 ccw(c805.72,242.72) P4.1@757.13,194.13 ; 737,242.72 ccw(c805.72,242.72) P4.1@757.13,194.13 ; 737,242.72 ccw(c805.72,242.72) P4.1@757.13,194.13 ; 737,242.72 ccw(c805.72,242.72) P4.1@757.13,194.13 ; R15.1@738.38,629.14 cw(c728.33,586.59) 770.56,597.9 ; R15.1@738.38,629.14 cw(c728.33,586.59) 770.56,597.9 ; R15.1@738.38,629.14 cw(c728.33,586.59) 770.56,597.9 ; R15.1@738.38,629.14 cw(c728.33,586.59) 770.56,597.9 ; R15.1@738.38,629.14 cw(c728.33,586.59) 770.56,597.9 ; R15.1@738.38,629.14 cw(c728.33,586.59) 770.56,597.9 ; R15.1@738.38,629.14 cw(c728.33,586.59) 770.56,597.9 ; R15.1@738.38,629.14 cw(c728.33,586.59) 770.56,597.9 ; R15.1@738.38,629.14 cw(c728.33,586.59) 770.56,597.9 ; R15.1@738.38,629.14 cw(c728.33,586.59) 770.56,597.9 ; R15.1@738.97,609.07 cw(c738.97,559.36) 774.12,594.51 ; R15.1@738.97,609.07 cw(c738.97,559.36) 774.12,594.51 ; R15.1@738.97,609.07 cw(c738.97,559.36) 774.12,594.51 ; R15.1@738.97,609.07 cw(c738.97,559.36) 774.12,594.51 ; R15.1@738.97,609.07 cw(c738.97,559.36) 774.12,594.51 ; R15.1@740.68,638.87 cw(c732.7,605.09) R15.1@766.23,614.07 ; R15.1@740.68,638.87 cw(c732.7,605.09) R15.1@766.23,614.07 ; R15.1@740.68,638.87 cw(c732.7,605.09) R15.1@766.23,614.07 ; R15.1@740.68,638.87 cw(c732.7,605.09) R15.1@766.23,614.07 ; R15.1@740.68,638.87 cw(c732.7,605.09) R15.1@766.23,614.07 ; R15.1@740.68,638.87 cw(c732.7,605.09) R15.1@766.23,614.07 ; R15.1@740.68,638.87 cw(c732.7,605.09) R15.1@766.23,614.07 ; R15.1@740.68,638.87 cw(c732.7,605.09) R15.1@766.23,614.07 ; R15.1@740.68,638.87 cw(c732.7,605.09) R15.1@766.23,614.07 ; R15.1@740.68,638.87 cw(c732.7,605.09) R15.1@766.23,614.07 ; R15.1@751.53,631.63 ccw(c786.6,631.63) R15.1@761.8,606.83 ; R15.1@751.53,631.63 ccw(c786.6,631.63) R15.1@761.8,606.83 ; R15.1@751.53,631.63 ccw(c786.6,631.63) R15.1@761.8,606.83 ; R15.1@751.53,631.63 ccw(c786.6,631.63) R15.1@761.8,606.83 ; R15.1@751.53,631.63 ccw(c786.6,631.63) R15.1@761.8,606.83 ; 754.76,412.13 cw(c796.63,370.26) R14.2@796.63,429.47 ; 754.76,412.13 cw(c796.63,370.26) R14.2@796.63,429.47 ; 754.76,412.13 cw(c796.63,370.26) R14.2@796.63,429.47 ; 754.76,412.13 cw(c796.63,370.26) R14.2@796.63,429.47 ; 754.76,412.13 cw(c796.63,370.26) R14.2@796.63,429.47 ; 759.51,416.88 ccw(c724.36,452.03) R14.2@774.07,452.03 ; 759.51,416.88 ccw(c724.36,452.03) R14.2@774.07,452.03 ; 759.51,416.88 ccw(c724.36,452.03) R14.2@774.07,452.03 ; 759.51,416.88 ccw(c724.36,452.03) R14.2@774.07,452.03 ; 759.51,416.88 ccw(c724.36,452.03) R14.2@774.07,452.03 ; R15.1@761.53,631.63 ccw(c820.74,631.63) 778.87,589.76 ; R15.1@761.53,631.63 ccw(c820.74,631.63) 778.87,589.76 ; R15.1@761.53,631.63 ccw(c820.74,631.63) 778.87,589.76 ; R15.1@761.53,631.63 ccw(c820.74,631.63) 778.87,589.76 ; R15.1@761.53,631.63 ccw(c820.74,631.63) 778.87,589.76 ; 762.9,420.44 ccw(c751.59,462.67) R14.2@794.14,452.62 ; 762.9,420.44 ccw(c751.59,462.67) R14.2@794.14,452.62 ; 762.9,420.44 ccw(c751.59,462.67) R14.2@794.14,452.62 ; 762.9,420.44 ccw(c751.59,462.67) R14.2@794.14,452.62 ; 762.9,420.44 ccw(c751.59,462.67) R14.2@794.14,452.62 ; 762.9,420.44 ccw(c751.59,462.67) R14.2@794.14,452.62 ; 762.9,420.44 ccw(c751.59,462.67) R14.2@794.14,452.62 ; 762.9,420.44 ccw(c751.59,462.67) R14.2@794.14,452.62 ; 762.9,420.44 ccw(c751.59,462.67) R14.2@794.14,452.62 ; 762.9,420.44 ccw(c751.59,462.67) R14.2@794.14,452.62 ; R14.2@769.78,436.01 cw(c800.82,427.69) R14.2@795.37,459.36 ; R14.2@769.78,436.01 cw(c800.82,427.69) R14.2@795.37,459.36 ; R14.2@769.78,436.01 cw(c800.82,427.69) R14.2@795.37,459.36 ; R14.2@769.78,436.01 cw(c800.82,427.69) R14.2@795.37,459.36 ; R14.2@769.78,436.01 cw(c800.82,427.69) R14.2@795.37,459.36 ; R14.2@769.78,436.01 cw(c800.82,427.69) R14.2@795.37,459.36 ; R14.2@769.78,436.01 cw(c800.82,427.69) R14.2@795.37,459.36 ; R14.2@769.78,436.01 cw(c800.82,427.69) R14.2@795.37,459.36 ; R14.2@769.78,436.01 cw(c800.82,427.69) R14.2@795.37,459.36 ; R14.2@769.78,436.01 cw(c800.82,427.69) R14.2@795.37,459.36 ; R14.2@771.83,429.2 cw(c796.63,404.4) R14.2@796.63,439.47 ; R14.2@771.83,429.2 cw(c796.63,404.4) R14.2@796.63,439.47 ; R14.2@771.83,429.2 cw(c796.63,404.4) R14.2@796.63,439.47 ; R14.2@771.83,429.2 cw(c796.63,404.4) R14.2@796.63,439.47 ; R14.2@771.83,429.2 cw(c796.63,404.4) R14.2@796.63,439.47 ; R14.2@779.07,424.77 ccw(c770.09,458.3) R14.2@803.87,450.32 ; R14.2@779.07,424.77 ccw(c770.09,458.3) R14.2@803.87,450.32 ; R14.2@779.07,424.77 ccw(c770.09,458.3) R14.2@803.87,450.32 ; R14.2@779.07,424.77 ccw(c770.09,458.3) R14.2@803.87,450.32 ; R14.2@779.07,424.77 ccw(c770.09,458.3) R14.2@803.87,450.32 ; R14.2@779.07,424.77 ccw(c770.09,458.3) R14.2@803.87,450.32 ; R14.2@779.07,424.77 ccw(c770.09,458.3) R14.2@803.87,450.32 ; R14.2@779.07,424.77 ccw(c770.09,458.3) R14.2@803.87,450.32 ; R14.2@779.07,424.77 ccw(c770.09,458.3) R14.2@803.87,450.32 ; R14.2@779.07,424.77 ccw(c770.09,458.3) R14.2@803.87,450.32 ; R14.2@780.68,471.92 ccw(c742.17,510.43) 796.63,510.43 ; R14.2@780.68,471.92 ccw(c742.17,510.43) 796.63,510.43 ; R14.2@780.68,471.92 ccw(c742.17,510.43) 796.63,510.43 ; R14.2@780.68,471.92 ccw(c742.17,510.43) 796.63,510.43 ; R14.2@780.68,471.92 ccw(c742.17,510.43) 796.63,510.43 ; R14.2@787.75,464.85 ccw(c766.31,486.29) 796.63,486.29 ; R14.2@787.75,464.85 ccw(c766.31,486.29) 796.63,486.29 ; R14.2@787.75,464.85 ccw(c766.31,486.29) 796.63,486.29 ; R14.2@787.75,464.85 ccw(c766.31,486.29) 796.63,486.29 ; R14.2@787.75,464.85 ccw(c766.31,486.29) 796.63,486.29 ; 796.63,486.29 ccw(c826.95,486.29) R14.2@805.51,464.85 ; 796.63,486.29 ccw(c826.95,486.29) R14.2@805.51,464.85 ; 796.63,486.29 ccw(c826.95,486.29) R14.2@805.51,464.85 ; 796.63,486.29 ccw(c826.95,486.29) R14.2@805.51,464.85 ; 796.63,486.29 ccw(c826.95,486.29) R14.2@805.51,464.85 ; 796.63,510.43 ccw(c851.09,510.43) R14.2@812.58,471.92 ; 796.63,510.43 ccw(c851.09,510.43) R14.2@812.58,471.92 ; 796.63,510.43 ccw(c851.09,510.43) R14.2@812.58,471.92 ; 796.63,510.43 ccw(c851.09,510.43) R14.2@812.58,471.92 ; 796.63,510.43 ccw(c851.09,510.43) R14.2@812.58,471.92
NetP4_2: P4.2 R13.1 R14.1 | length 5610.2
  Top Layer w10: R13.1@929,629.63 875.37,576 R14.1@875.37,454 933.85,395.52 P4.2@933.85,174 ; R14.1@859.42,471.92 ccw(c820.91,510.43) 875.37,510.43 ; R14.1@859.42,471.92 ccw(c820.91,510.43) 875.37,510.43 ; R14.1@859.42,471.92 ccw(c820.91,510.43) 875.37,510.43 ; R14.1@859.42,471.92 ccw(c820.91,510.43) 875.37,510.43 ; R14.1@859.42,471.92 ccw(c820.91,510.43) 875.37,510.43 ; R14.1@866.49,464.85 ccw(c845.05,486.29) 875.37,486.29 ; R14.1@866.49,464.85 ccw(c845.05,486.29) 875.37,486.29 ; R14.1@866.49,464.85 ccw(c845.05,486.29) 875.37,486.29 ; R14.1@866.49,464.85 ccw(c845.05,486.29) 875.37,486.29 ; R14.1@866.49,464.85 ccw(c845.05,486.29) 875.37,486.29 ; R14.1@868.13,450.32 ccw(c901.91,458.3) R14.1@892.93,424.77 ; R14.1@868.13,450.32 ccw(c901.91,458.3) R14.1@892.93,424.77 ; R14.1@868.13,450.32 ccw(c901.91,458.3) R14.1@892.93,424.77 ; R14.1@868.13,450.32 ccw(c901.91,458.3) R14.1@892.93,424.77 ; R14.1@868.13,450.32 ccw(c901.91,458.3) R14.1@892.93,424.77 ; R14.1@868.13,450.32 ccw(c901.91,458.3) R14.1@892.93,424.77 ; R14.1@868.13,450.32 ccw(c901.91,458.3) R14.1@892.93,424.77 ; R14.1@868.13,450.32 ccw(c901.91,458.3) R14.1@892.93,424.77 ; R14.1@868.13,450.32 ccw(c901.91,458.3) R14.1@892.93,424.77 ; R14.1@868.13,450.32 ccw(c901.91,458.3) R14.1@892.93,424.77 ; R14.1@875.37,429.47 cw(c875.37,370.26) 917.24,412.13 ; R14.1@875.37,429.47 cw(c875.37,370.26) 917.24,412.13 ; R14.1@875.37,429.47 cw(c875.37,370.26) 917.24,412.13 ; R14.1@875.37,429.47 cw(c875.37,370.26) 917.24,412.13 ; R14.1@875.37,429.47 cw(c875.37,370.26) 917.24,412.13 ; R14.1@875.37,439.47 cw(c875.37,404.4) R14.1@900.17,429.2 ; R14.1@875.37,439.47 cw(c875.37,404.4) R14.1@900.17,429.2 ; R14.1@875.37,439.47 cw(c875.37,404.4) R14.1@900.17,429.2 ; R14.1@875.37,439.47 cw(c875.37,404.4) R14.1@900.17,429.2 ; R14.1@875.37,439.47 cw(c875.37,404.4) R14.1@900.17,429.2 ; 875.37,486.29 ccw(c905.69,486.29) R14.1@884.25,464.85 ; 875.37,486.29 ccw(c905.69,486.29) R14.1@884.25,464.85 ; 875.37,486.29 ccw(c905.69,486.29) R14.1@884.25,464.85 ; 875.37,486.29 ccw(c905.69,486.29) R14.1@884.25,464.85 ; 875.37,486.29 ccw(c905.69,486.29) R14.1@884.25,464.85 ; 875.37,510.43 ccw(c929.83,510.43) R14.1@891.32,471.92 ; 875.37,510.43 ccw(c929.83,510.43) R14.1@891.32,471.92 ; 875.37,510.43 ccw(c929.83,510.43) R14.1@891.32,471.92 ; 875.37,510.43 ccw(c929.83,510.43) R14.1@891.32,471.92 ; 875.37,510.43 ccw(c929.83,510.43) R14.1@891.32,471.92 ; R14.1@876.63,459.36 cw(c871.18,427.69) R14.1@902.22,436.01 ; R14.1@876.63,459.36 cw(c871.18,427.69) R14.1@902.22,436.01 ; R14.1@876.63,459.36 cw(c871.18,427.69) R14.1@902.22,436.01 ; R14.1@876.63,459.36 cw(c871.18,427.69) R14.1@902.22,436.01 ; R14.1@876.63,459.36 cw(c871.18,427.69) R14.1@902.22,436.01 ; R14.1@876.63,459.36 cw(c871.18,427.69) R14.1@902.22,436.01 ; R14.1@876.63,459.36 cw(c871.18,427.69) R14.1@902.22,436.01 ; R14.1@876.63,459.36 cw(c871.18,427.69) R14.1@902.22,436.01 ; R14.1@876.63,459.36 cw(c871.18,427.69) R14.1@902.22,436.01 ; R14.1@876.63,459.36 cw(c871.18,427.69) R14.1@902.22,436.01 ; R14.1@877.86,452.62 ccw(c920.41,462.67) 909.1,420.44 ; R14.1@877.86,452.62 ccw(c920.41,462.67) 909.1,420.44 ; R14.1@877.86,452.62 ccw(c920.41,462.67) 909.1,420.44 ; R14.1@877.86,452.62 ccw(c920.41,462.67) 909.1,420.44 ; R14.1@877.86,452.62 ccw(c920.41,462.67) 909.1,420.44 ; R14.1@877.86,452.62 ccw(c920.41,462.67) 909.1,420.44 ; R14.1@877.86,452.62 ccw(c920.41,462.67) 909.1,420.44 ; R14.1@877.86,452.62 ccw(c920.41,462.67) 909.1,420.44 ; R14.1@877.86,452.62 ccw(c920.41,462.67) 909.1,420.44 ; R14.1@877.86,452.62 ccw(c920.41,462.67) 909.1,420.44 ; 887.13,587.76 ccw(c845.26,629.63) R13.1@904.47,629.63 ; 887.13,587.76 ccw(c845.26,629.63) R13.1@904.47,629.63 ; 887.13,587.76 ccw(c845.26,629.63) R13.1@904.47,629.63 ; 887.13,587.76 ccw(c845.26,629.63) R13.1@904.47,629.63 ; 887.13,587.76 ccw(c845.26,629.63) R13.1@904.47,629.63 ; 891.88,592.51 cw(c927.03,557.36) R13.1@927.03,607.07 ; 891.88,592.51 cw(c927.03,557.36) R13.1@927.03,607.07 ; 891.88,592.51 cw(c927.03,557.36) R13.1@927.03,607.07 ; 891.88,592.51 cw(c927.03,557.36) R13.1@927.03,607.07 ; 891.88,592.51 cw(c927.03,557.36) R13.1@927.03,607.07 ; 895.44,595.9 cw(c937.67,584.59) R13.1@927.62,627.14 ; 895.44,595.9 cw(c937.67,584.59) R13.1@927.62,627.14 ; 895.44,595.9 cw(c937.67,584.59) R13.1@927.62,627.14 ; 895.44,595.9 cw(c937.67,584.59) R13.1@927.62,627.14 ; 895.44,595.9 cw(c937.67,584.59) R13.1@927.62,627.14 ; 895.44,595.9 cw(c937.67,584.59) R13.1@927.62,627.14 ; 895.44,595.9 cw(c937.67,584.59) R13.1@927.62,627.14 ; 895.44,595.9 cw(c937.67,584.59) R13.1@927.62,627.14 ; 895.44,595.9 cw(c937.67,584.59) R13.1@927.62,627.14 ; 895.44,595.9 cw(c937.67,584.59) R13.1@927.62,627.14 ; R14.1@897.93,452.03 ccw(c947.64,452.03) 912.49,416.88 ; R14.1@897.93,452.03 ccw(c947.64,452.03) 912.49,416.88 ; R14.1@897.93,452.03 ccw(c947.64,452.03) 912.49,416.88 ; R14.1@897.93,452.03 ccw(c947.64,452.03) 912.49,416.88 ; R14.1@897.93,452.03 ccw(c947.64,452.03) 912.49,416.88 ; R13.1@899.77,612.07 cw(c933.3,603.09) R13.1@925.32,636.87 ; R13.1@899.77,612.07 cw(c933.3,603.09) R13.1@925.32,636.87 ; R13.1@899.77,612.07 cw(c933.3,603.09) R13.1@925.32,636.87 ; R13.1@899.77,612.07 cw(c933.3,603.09) R13.1@925.32,636.87 ; R13.1@899.77,612.07 cw(c933.3,603.09) R13.1@925.32,636.87 ; R13.1@899.77,612.07 cw(c933.3,603.09) R13.1@925.32,636.87 ; R13.1@899.77,612.07 cw(c933.3,603.09) R13.1@925.32,636.87 ; R13.1@899.77,612.07 cw(c933.3,603.09) R13.1@925.32,636.87 ; R13.1@899.77,612.07 cw(c933.3,603.09) R13.1@925.32,636.87 ; R13.1@899.77,612.07 cw(c933.3,603.09) R13.1@925.32,636.87 ; R13.1@904.2,604.83 ccw(c879.4,629.63) R13.1@914.47,629.63 ; R13.1@904.2,604.83 ccw(c879.4,629.63) R13.1@914.47,629.63 ; R13.1@904.2,604.83 ccw(c879.4,629.63) R13.1@914.47,629.63 ; R13.1@904.2,604.83 ccw(c879.4,629.63) R13.1@914.47,629.63 ; R13.1@904.2,604.83 ccw(c879.4,629.63) R13.1@914.47,629.63 ; R13.1@911.01,602.78 ccw(c902.69,633.82) R13.1@934.36,628.37 ; R13.1@911.01,602.78 ccw(c902.69,633.82) R13.1@934.36,628.37 ; R13.1@911.01,602.78 ccw(c902.69,633.82) R13.1@934.36,628.37 ; R13.1@911.01,602.78 ccw(c902.69,633.82) R13.1@934.36,628.37 ; R13.1@911.01,602.78 ccw(c902.69,633.82) R13.1@934.36,628.37 ; R13.1@911.01,602.78 ccw(c902.69,633.82) R13.1@934.36,628.37 ; R13.1@911.01,602.78 ccw(c902.69,633.82) R13.1@934.36,628.37 ; R13.1@911.01,602.78 ccw(c902.69,633.82) R13.1@934.36,628.37 ; R13.1@911.01,602.78 ccw(c902.69,633.82) R13.1@934.36,628.37 ; R13.1@911.01,602.78 ccw(c902.69,633.82) R13.1@934.36,628.37 ; P4.2@913.72,194.13 ccw(c865.13,242.72) 933.85,242.72 ; P4.2@913.72,194.13 ccw(c865.13,242.72) 933.85,242.72 ; P4.2@913.72,194.13 ccw(c865.13,242.72) 933.85,242.72 ; P4.2@913.72,194.13 ccw(c865.13,242.72) 933.85,242.72 ; P4.2@913.72,194.13 ccw(c865.13,242.72) 933.85,242.72 ; P4.2@920.79,187.06 ccw(c889.27,218.58) 933.85,218.58 ; P4.2@920.79,187.06 ccw(c889.27,218.58) 933.85,218.58 ; P4.2@920.79,187.06 ccw(c889.27,218.58) 933.85,218.58 ; P4.2@920.79,187.06 ccw(c889.27,218.58) 933.85,218.58 ; P4.2@920.79,187.06 ccw(c889.27,218.58) 933.85,218.58 ; 933.85,218.58 ccw(c978.43,218.58) P4.2@946.91,187.06 ; 933.85,218.58 ccw(c978.43,218.58) P4.2@946.91,187.06 ; 933.85,218.58 ccw(c978.43,218.58) P4.2@946.91,187.06 ; 933.85,218.58 ccw(c978.43,218.58) P4.2@946.91,187.06 ; 933.85,218.58 ccw(c978.43,218.58) P4.2@946.91,187.06 ; 933.85,242.72 ccw(c1002.57,242.72) P4.2@953.98,194.13 ; 933.85,242.72 ccw(c1002.57,242.72) P4.2@953.98,194.13 ; 933.85,242.72 ccw(c1002.57,242.72) P4.2@953.98,194.13 ; 933.85,242.72 ccw(c1002.57,242.72) P4.2@953.98,194.13 ; 933.85,242.72 ccw(c1002.57,242.72) P4.2@953.98,194.13
NetP5_2: P5.2 R16.1 | length 1041
  Top Layer w25: R16.1@1346,469 1389.85,425.15 P5.2@1389.85,174 ; R16.1@1346,450 cw(c1346,404.14) 1378.43,436.57 ; R16.1@1346,450 cw(c1346,404.14) 1378.43,436.57 ; R16.1@1346,450 cw(c1346,404.14) 1378.43,436.57 ; R16.1@1346,450 cw(c1346,404.14) 1378.43,436.57 ; R16.1@1346,450 cw(c1346,404.14) 1378.43,436.57 ; R16.1@1363.42,467.43 ccw(c1401.68,467.43) R16.1@1374.63,440.37 ; R16.1@1363.42,467.43 ccw(c1401.68,467.43) R16.1@1374.63,440.37 ; R16.1@1363.42,467.43 ccw(c1401.68,467.43) R16.1@1374.63,440.37 ; R16.1@1363.42,467.43 ccw(c1401.68,467.43) R16.1@1374.63,440.37 ; R16.1@1363.42,467.43 ccw(c1401.68,467.43) R16.1@1374.63,440.37 ; P5.2@1375.03,188.82 ccw(c1339.24,224.61) 1389.85,224.61 ; P5.2@1375.03,188.82 ccw(c1339.24,224.61) 1389.85,224.61 ; P5.2@1375.03,188.82 ccw(c1339.24,224.61) 1389.85,224.61 ; P5.2@1375.03,188.82 ccw(c1339.24,224.61) 1389.85,224.61 ; P5.2@1375.03,188.82 ccw(c1339.24,224.61) 1389.85,224.61 ; 1389.85,224.61 ccw(c1440.46,224.61) P5.2@1404.67,188.82 ; 1389.85,224.61 ccw(c1440.46,224.61) P5.2@1404.67,188.82 ; 1389.85,224.61 ccw(c1440.46,224.61) P5.2@1404.67,188.82 ; 1389.85,224.61 ccw(c1440.46,224.61) P5.2@1404.67,188.82 ; 1389.85,224.61 ccw(c1440.46,224.61) P5.2@1404.67,188.82
NetR1_1: R1.1 U1.20 | length 3490.1
  Top Layer w10: U1.20@2409.45,1929.53 2486.47,1929.53 2493,1923 v2(2493,1920) ; R1.1@2558,965.63 v2(2558,1049) ; U1.20@2439.82,1929.53 cw(c2439.82,1866.82) v2@2484.16,1911.16 ; U1.20@2439.82,1929.53 cw(c2439.82,1866.82) v2@2484.16,1911.16 ; U1.20@2439.82,1929.53 cw(c2439.82,1866.82) v2@2484.16,1911.16 ; U1.20@2439.82,1929.53 cw(c2439.82,1866.82) v2@2484.16,1911.16 ; U1.20@2439.82,1929.53 cw(c2439.82,1866.82) v2@2484.16,1911.16 ; 2462.09,1923.91 ccw(c2470.37,1938.26) v2@2483.27,1927.85 ; 2462.09,1923.91 ccw(c2470.37,1938.26) v2@2483.27,1927.85 ; 2462.09,1923.91 ccw(c2470.37,1938.26) v2@2483.27,1927.85 ; 2462.09,1923.91 ccw(c2470.37,1938.26) v2@2483.27,1927.85 ; 2462.09,1923.91 ccw(c2470.37,1938.26) v2@2483.27,1927.85 ; 2462.09,1923.91 ccw(c2470.37,1938.26) v2@2483.27,1927.85 ; 2462.09,1923.91 ccw(c2470.37,1938.26) v2@2483.27,1927.85 ; 2462.09,1923.91 ccw(c2470.37,1938.26) v2@2483.27,1927.85 ; 2462.09,1923.91 ccw(c2470.37,1938.26) v2@2483.27,1927.85 ; 2462.09,1923.91 ccw(c2470.37,1938.26) v2@2483.27,1927.85 ; 2463.96,1929.53 cw(c2463.96,1890.96) v2@2491.23,1918.23 ; 2463.96,1929.53 cw(c2463.96,1890.96) v2@2491.23,1918.23 ; 2463.96,1929.53 cw(c2463.96,1890.96) v2@2491.23,1918.23 ; 2463.96,1929.53 cw(c2463.96,1890.96) v2@2491.23,1918.23 ; 2463.96,1929.53 cw(c2463.96,1890.96) v2@2491.23,1918.23 ; 2472.21,1918.06 ccw(c2479.58,1930.83) v2@2491.05,1921.57 ; 2472.21,1918.06 ccw(c2479.58,1930.83) v2@2491.05,1921.57 ; 2472.21,1918.06 ccw(c2479.58,1930.83) v2@2491.05,1921.57 ; 2472.21,1918.06 ccw(c2479.58,1930.83) v2@2491.05,1921.57 ; 2472.21,1918.06 ccw(c2479.58,1930.83) v2@2491.05,1921.57 ; 2472.21,1918.06 ccw(c2479.58,1930.83) v2@2491.05,1921.57 ; 2472.21,1918.06 ccw(c2479.58,1930.83) v2@2491.05,1921.57 ; 2472.21,1918.06 ccw(c2479.58,1930.83) v2@2491.05,1921.57 ; 2472.21,1918.06 ccw(c2479.58,1930.83) v2@2491.05,1921.57 ; 2472.21,1918.06 ccw(c2479.58,1930.83) v2@2491.05,1921.57 ; 2475.15,1927.52 cw(c2469.73,1918.12) v2@2480.54,1918.99 ; 2475.15,1927.52 ccw(c2478.82,1933.87) v2@2484.06,1928.74 ; 2475.15,1927.52 cw(c2469.73,1918.12) v2@2480.54,1918.99 ; 2475.15,1927.52 ccw(c2478.82,1933.87) v2@2484.06,1928.74 ; 2475.15,1927.52 cw(c2469.73,1918.12) v2@2480.54,1918.99 ; 2475.15,1927.52 ccw(c2478.82,1933.87) v2@2484.06,1928.74 ; 2475.15,1927.52 cw(c2469.73,1918.12) v2@2480.54,1918.99 ; 2475.15,1927.52 ccw(c2478.82,1933.87) v2@2484.06,1928.74 ; 2475.15,1927.52 cw(c2469.73,1918.12) v2@2480.54,1918.99 ; 2475.15,1927.52 ccw(c2478.82,1933.87) v2@2484.06,1928.74 ; 2475.15,1927.52 cw(c2469.73,1918.12) v2@2480.54,1918.99 ; 2475.15,1927.52 ccw(c2478.82,1933.87) v2@2484.06,1928.74 ; 2475.15,1927.52 cw(c2469.73,1918.12) v2@2480.54,1918.99 ; 2475.15,1927.52 ccw(c2478.82,1933.87) v2@2484.06,1928.74 ; 2475.15,1927.52 cw(c2469.73,1918.12) v2@2480.54,1918.99 ; 2475.15,1927.52 ccw(c2478.82,1933.87) v2@2484.06,1928.74 ; 2475.15,1927.52 cw(c2469.73,1918.12) v2@2480.54,1918.99 ; 2475.15,1927.52 ccw(c2478.82,1933.87) v2@2484.06,1928.74 ; 2475.15,1927.52 cw(c2469.73,1918.12) v2@2480.54,1918.99 ; 2475.15,1927.52 ccw(c2478.82,1933.87) v2@2484.06,1928.74 ; R1.1@2541.42,982.92 ccw(c2501.39,1022.95) 2558,1022.95 ; R1.1@2541.42,982.92 ccw(c2501.39,1022.95) 2558,1022.95 ; R1.1@2541.42,982.92 ccw(c2501.39,1022.95) 2558,1022.95 ; R1.1@2541.42,982.92 ccw(c2501.39,1022.95) 2558,1022.95 ; R1.1@2541.42,982.92 ccw(c2501.39,1022.95) 2558,1022.95 ; R1.1@2548.49,975.85 ccw(c2525.53,998.81) 2558,998.81 ; R1.1@2548.49,975.85 ccw(c2525.53,998.81) 2558,998.81 ; R1.1@2548.49,975.85 ccw(c2525.53,998.81) 2558,998.81 ; R1.1@2548.49,975.85 ccw(c2525.53,998.81) 2558,998.81 ; R1.1@2548.49,975.85 ccw(c2525.53,998.81) 2558,998.81 ; v2@2549.16,1040.16 cw(c2527.82,1018.82) 2558,1018.82 ; v2@2549.16,1040.16 cw(c2527.82,1018.82) 2558,1018.82 ; v2@2549.16,1040.16 cw(c2527.82,1018.82) 2558,1018.82 ; v2@2549.16,1040.16 cw(c2527.82,1018.82) 2558,1018.82 ; v2@2549.16,1040.16 cw(c2527.82,1018.82) 2558,1018.82 ; 2558,995.77 ccw(c2586.17,995.77) R1.1@2566.25,975.85 ; 2558,995.77 ccw(c2586.17,995.77) R1.1@2566.25,975.85 ; 2558,995.77 ccw(c2586.17,995.77) R1.1@2566.25,975.85 ; 2558,995.77 ccw(c2586.17,995.77) R1.1@2566.25,975.85 ; 2558,995.77 ccw(c2586.17,995.77) R1.1@2566.25,975.85 ; 2558,1018.82 cw(c2588.18,1018.82) v2@2566.84,1040.16 ; 2558,1018.82 cw(c2588.18,1018.82) v2@2566.84,1040.16 ; 2558,1018.82 cw(c2588.18,1018.82) v2@2566.84,1040.16 ; 2558,1018.82 cw(c2588.18,1018.82) v2@2566.84,1040.16 ; 2558,1018.82 cw(c2588.18,1018.82) v2@2566.84,1040.16 ; 2558,1019.91 ccw(c2610.31,1019.91) R1.1@2573.32,982.92 ; 2558,1019.91 ccw(c2610.31,1019.91) R1.1@2573.32,982.92 ; 2558,1019.91 ccw(c2610.31,1019.91) R1.1@2573.32,982.92 ; 2558,1019.91 ccw(c2610.31,1019.91) R1.1@2573.32,982.92 ; 2558,1019.91 ccw(c2610.31,1019.91) R1.1@2573.32,982.92
  Bottom Layer w10: v2(2493,1920) 2541,1872 2541,1870 2556,1855 2556,1051 v2(2558,1049) ; v2@2493,1907.5 cw(c2493,1877.32) 2514.34,1898.66 ; v2@2493,1907.5 cw(c2493,1877.32) 2514.34,1898.66 ; v2@2493,1907.5 cw(c2493,1877.32) 2514.34,1898.66 ; v2@2493,1907.5 cw(c2493,1877.32) 2514.34,1898.66 ; v2@2493,1907.5 cw(c2493,1877.32) 2514.34,1898.66 ; v2@2505.5,1920 ccw(c2535.68,1920) 2514.34,1898.66 ; v2@2505.5,1920 ccw(c2535.68,1920) 2514.34,1898.66 ; v2@2505.5,1920 ccw(c2535.68,1920) 2514.34,1898.66 ; v2@2505.5,1920 ccw(c2535.68,1920) 2514.34,1898.66 ; v2@2505.5,1920 ccw(c2535.68,1920) 2514.34,1898.66 ; v2@2549.16,1057.84 ccw(c2532.65,1074.35) 2556,1074.35 ; v2@2549.16,1057.84 ccw(c2532.65,1074.35) 2556,1074.35 ; v2@2549.16,1057.84 ccw(c2532.65,1074.35) 2556,1074.35 ; v2@2549.16,1057.84 ccw(c2532.65,1074.35) 2556,1074.35 ; v2@2549.16,1057.84 ccw(c2532.65,1074.35) 2556,1074.35 ; 2556,1084.01 ccw(c2593.01,1084.01) v2@2566.84,1057.84 ; 2556,1084.01 ccw(c2593.01,1084.01) v2@2566.84,1057.84 ; 2556,1084.01 ccw(c2593.01,1084.01) v2@2566.84,1057.84 ; 2556,1084.01 ccw(c2593.01,1084.01) v2@2566.84,1057.84 ; 2556,1084.01 ccw(c2593.01,1084.01) v2@2566.84,1057.84
NetR8_2: R8.2 U1.44 | length 2854.9
  Top Layer w10: R8.2@2015.63,963 1932,1046.63 1932,1833 1969.47,1870.47 U1.44@2090.55,1870.47 ; 1973.76,1004.87 ccw(c2015.63,1046.74) R8.2@2015.63,987.53 ; 1973.76,1004.87 ccw(c2015.63,1046.74) R8.2@2015.63,987.53 ; 1973.76,1004.87 ccw(c2015.63,1046.74) R8.2@2015.63,987.53 ; 1973.76,1004.87 ccw(c2015.63,1046.74) R8.2@2015.63,987.53 ; 1973.76,1004.87 ccw(c2015.63,1046.74) R8.2@2015.63,987.53 ; 1978.51,1000.12 cw(c1943.36,964.97) R8.2@1993.07,964.97 ; 1978.51,1000.12 cw(c1943.36,964.97) R8.2@1993.07,964.97 ; 1978.51,1000.12 cw(c1943.36,964.97) R8.2@1993.07,964.97 ; 1978.51,1000.12 cw(c1943.36,964.97) R8.2@1993.07,964.97 ; 1978.51,1000.12 cw(c1943.36,964.97) R8.2@1993.07,964.97 ; 1981.91,996.57 cw(c1970.59,954.33) R8.2@2013.14,964.38 ; 1981.91,996.57 cw(c1970.59,954.33) R8.2@2013.14,964.38 ; 1981.91,996.57 cw(c1970.59,954.33) R8.2@2013.14,964.38 ; 1981.91,996.57 cw(c1970.59,954.33) R8.2@2013.14,964.38 ; 1981.91,996.57 cw(c1970.59,954.33) R8.2@2013.14,964.38 ; 1981.91,996.57 cw(c1970.59,954.33) R8.2@2013.14,964.38 ; 1981.91,996.57 cw(c1970.59,954.33) R8.2@2013.14,964.38 ; 1981.91,996.57 cw(c1970.59,954.33) R8.2@2013.14,964.38 ; 1981.91,996.57 cw(c1970.59,954.33) R8.2@2013.14,964.38 ; 1981.91,996.57 cw(c1970.59,954.33) R8.2@2013.14,964.38 ; R8.2@1988.78,980.99 ccw(c2019.82,989.31) R8.2@2014.37,957.64 ; R8.2@1988.78,980.99 ccw(c2019.82,989.31) R8.2@2014.37,957.64 ; R8.2@1988.78,980.99 ccw(c2019.82,989.31) R8.2@2014.37,957.64 ; R8.2@1988.78,980.99 ccw(c2019.82,989.31) R8.2@2014.37,957.64 ; R8.2@1988.78,980.99 ccw(c2019.82,989.31) R8.2@2014.37,957.64 ; R8.2@1988.78,980.99 ccw(c2019.82,989.31) R8.2@2014.37,957.64 ; R8.2@1988.78,980.99 ccw(c2019.82,989.31) R8.2@2014.37,957.64 ; R8.2@1988.78,980.99 ccw(c2019.82,989.31) R8.2@2014.37,957.64 ; R8.2@1988.78,980.99 ccw(c2019.82,989.31) R8.2@2014.37,957.64 ; R8.2@1988.78,980.99 ccw(c2019.82,989.31) R8.2@2014.37,957.64 ; R8.2@1990.83,987.8 ccw(c2015.63,1012.6) R8.2@2015.63,977.53 ; R8.2@1990.83,987.8 ccw(c2015.63,1012.6) R8.2@2015.63,977.53 ; R8.2@1990.83,987.8 ccw(c2015.63,1012.6) R8.2@2015.63,977.53 ; R8.2@1990.83,987.8 ccw(c2015.63,1012.6) R8.2@2015.63,977.53 ; R8.2@1990.83,987.8 ccw(c2015.63,1012.6) R8.2@2015.63,977.53 ; R8.2@1998.07,992.23 cw(c1989.09,958.7) R8.2@2022.87,966.68 ; R8.2@1998.07,992.23 cw(c1989.09,958.7) R8.2@2022.87,966.68 ; R8.2@1998.07,992.23 cw(c1989.09,958.7) R8.2@2022.87,966.68 ; R8.2@1998.07,992.23 cw(c1989.09,958.7) R8.2@2022.87,966.68 ; R8.2@1998.07,992.23 cw(c1989.09,958.7) R8.2@2022.87,966.68 ; R8.2@1998.07,992.23 cw(c1989.09,958.7) R8.2@2022.87,966.68 ; R8.2@1998.07,992.23 cw(c1989.09,958.7) R8.2@2022.87,966.68 ; R8.2@1998.07,992.23 cw(c1989.09,958.7) R8.2@2022.87,966.68 ; R8.2@1998.07,992.23 cw(c1989.09,958.7) R8.2@2022.87,966.68 ; R8.2@1998.07,992.23 cw(c1989.09,958.7) R8.2@2022.87,966.68
NetR16_2: R16.2 R17.1 | length 757.8
  Top Layer w25: R16.2@1212.14,469 1212.14,562.14 R17.1@1215,565 ; R16.2@1199.82,482.89 ccw(c1170.08,512.63) 1212.14,512.63 ; R16.2@1199.82,482.89 ccw(c1170.08,512.63) 1212.14,512.63 ; R16.2@1199.82,482.89 ccw(c1170.08,512.63) 1212.14,512.63 ; R16.2@1199.82,482.89 ccw(c1170.08,512.63) 1212.14,512.63 ; R16.2@1199.82,482.89 ccw(c1170.08,512.63) 1212.14,512.63 ; R17.1@1201.11,552.68 cw(c1174.46,526.04) 1212.14,526.04 ; R17.1@1201.11,552.68 cw(c1174.46,526.04) 1212.14,526.04 ; R17.1@1201.11,552.68 cw(c1174.46,526.04) 1212.14,526.04 ; R17.1@1201.11,552.68 cw(c1174.46,526.04) 1212.14,526.04 ; R17.1@1201.11,552.68 cw(c1174.46,526.04) 1212.14,526.04 ; 1212.14,512.63 ccw(c1254.2,512.63) R16.2@1224.46,482.89 ; 1212.14,512.63 ccw(c1254.2,512.63) R16.2@1224.46,482.89 ; 1212.14,512.63 ccw(c1254.2,512.63) R16.2@1224.46,482.89 ; 1212.14,512.63 ccw(c1254.2,512.63) R16.2@1224.46,482.89 ; 1212.14,512.63 ccw(c1254.2,512.63) R16.2@1224.46,482.89 ; 1212.14,519.84 cw(c1258.58,519.84) R17.1@1225.74,552.68 ; 1212.14,519.84 cw(c1258.58,519.84) R17.1@1225.74,552.68 ; 1212.14,519.84 cw(c1258.58,519.84) R17.1@1225.74,552.68 ; 1212.14,519.84 cw(c1258.58,519.84) R17.1@1225.74,552.68 ; 1212.14,519.84 cw(c1258.58,519.84) R17.1@1225.74,552.68